# Altium PCB V3GPS_Rev3.PcbDoc
Units mm, origin at the board's own origin, x right, y up, seen from the top; angles counter-clockwise.
Board outline 43 x 47 mm, 4 copper layers (GND, Sig+Power1, Sig+Power2, GND2), stack 0.603 mm thick; 21 components, 16 nets, 85 pads, 116 vias.
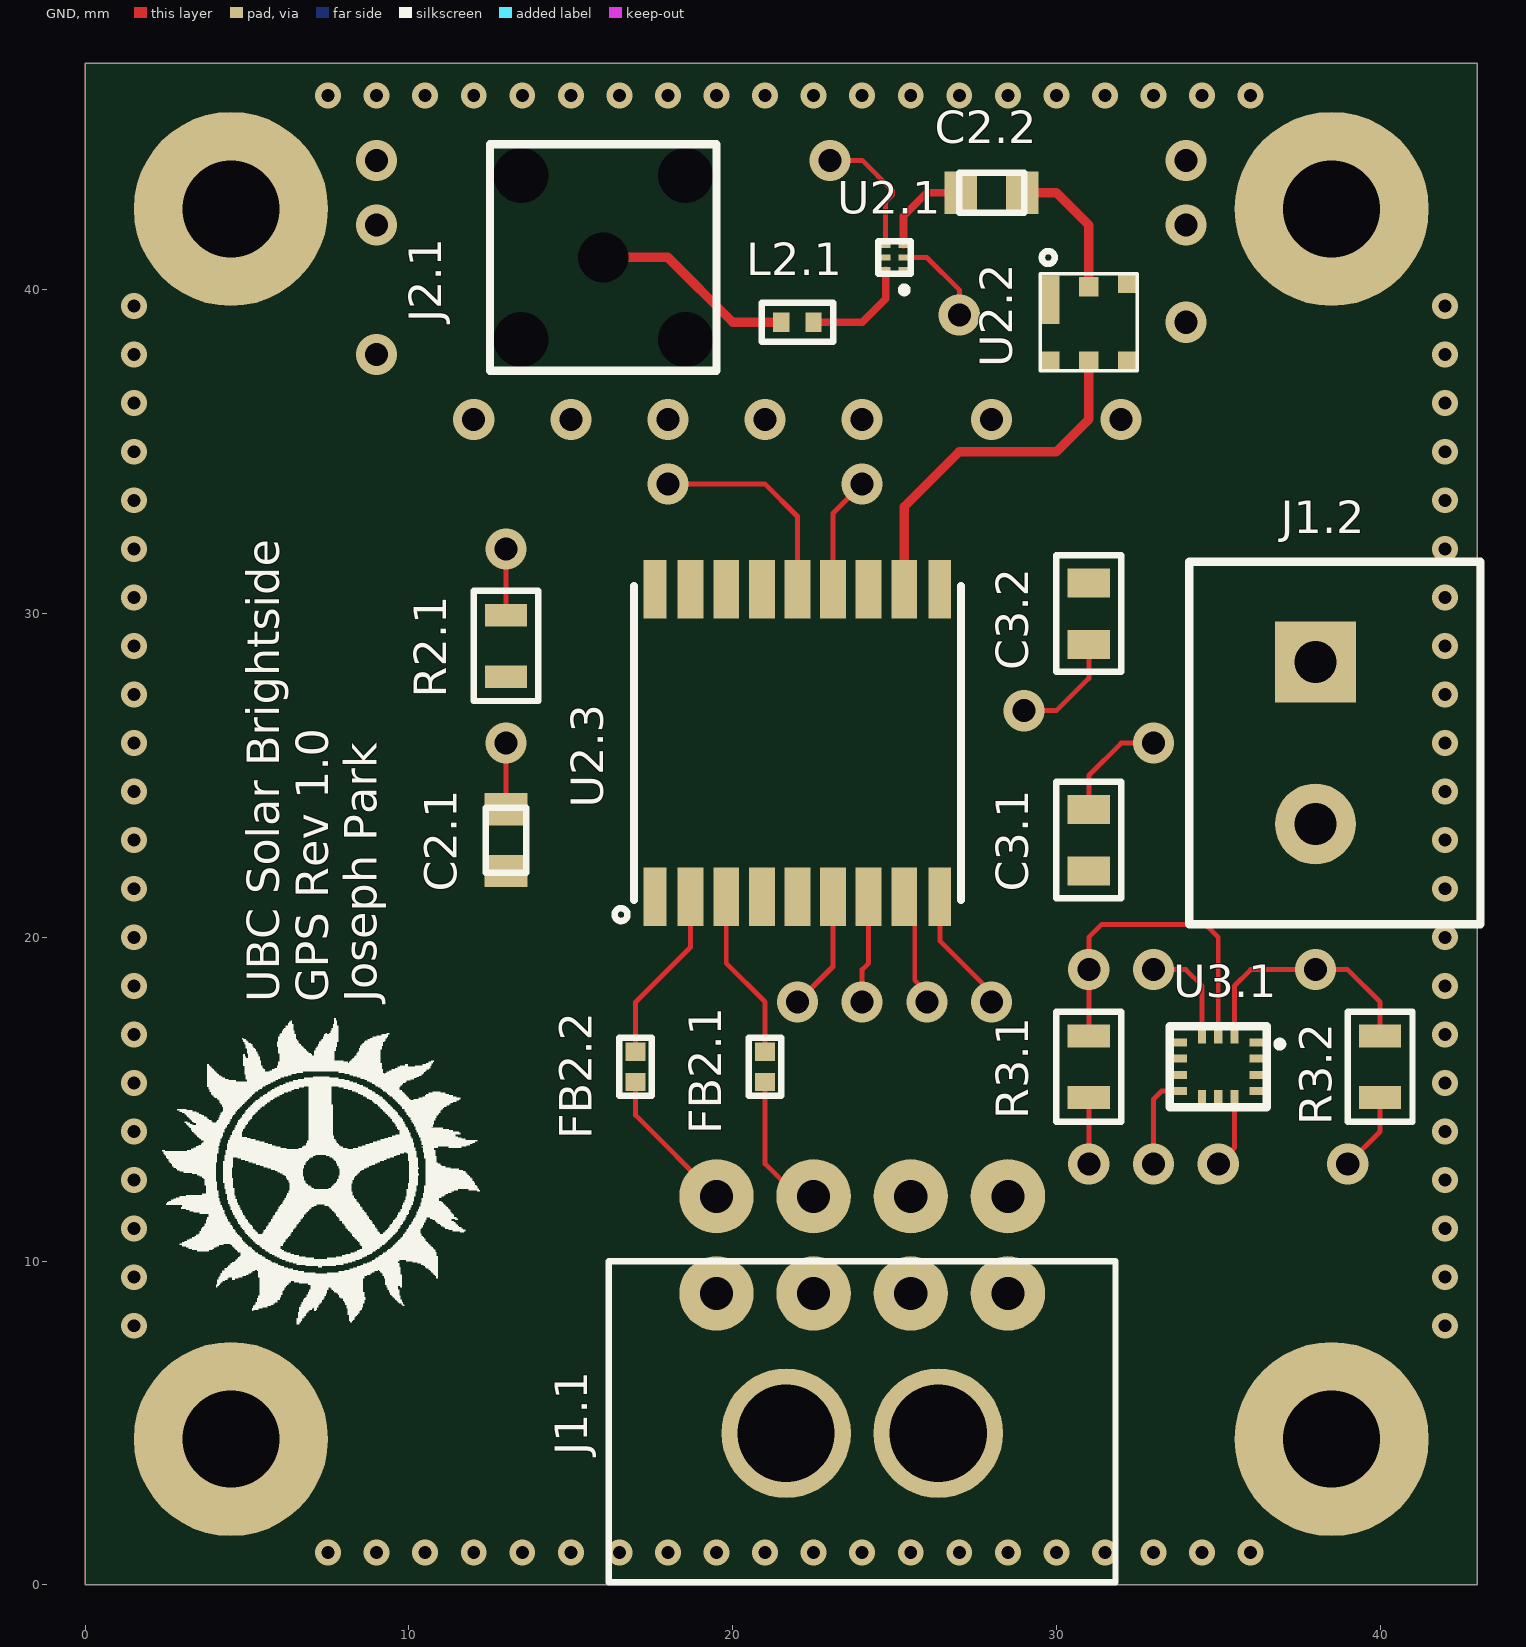
[diagram p0: GND view]
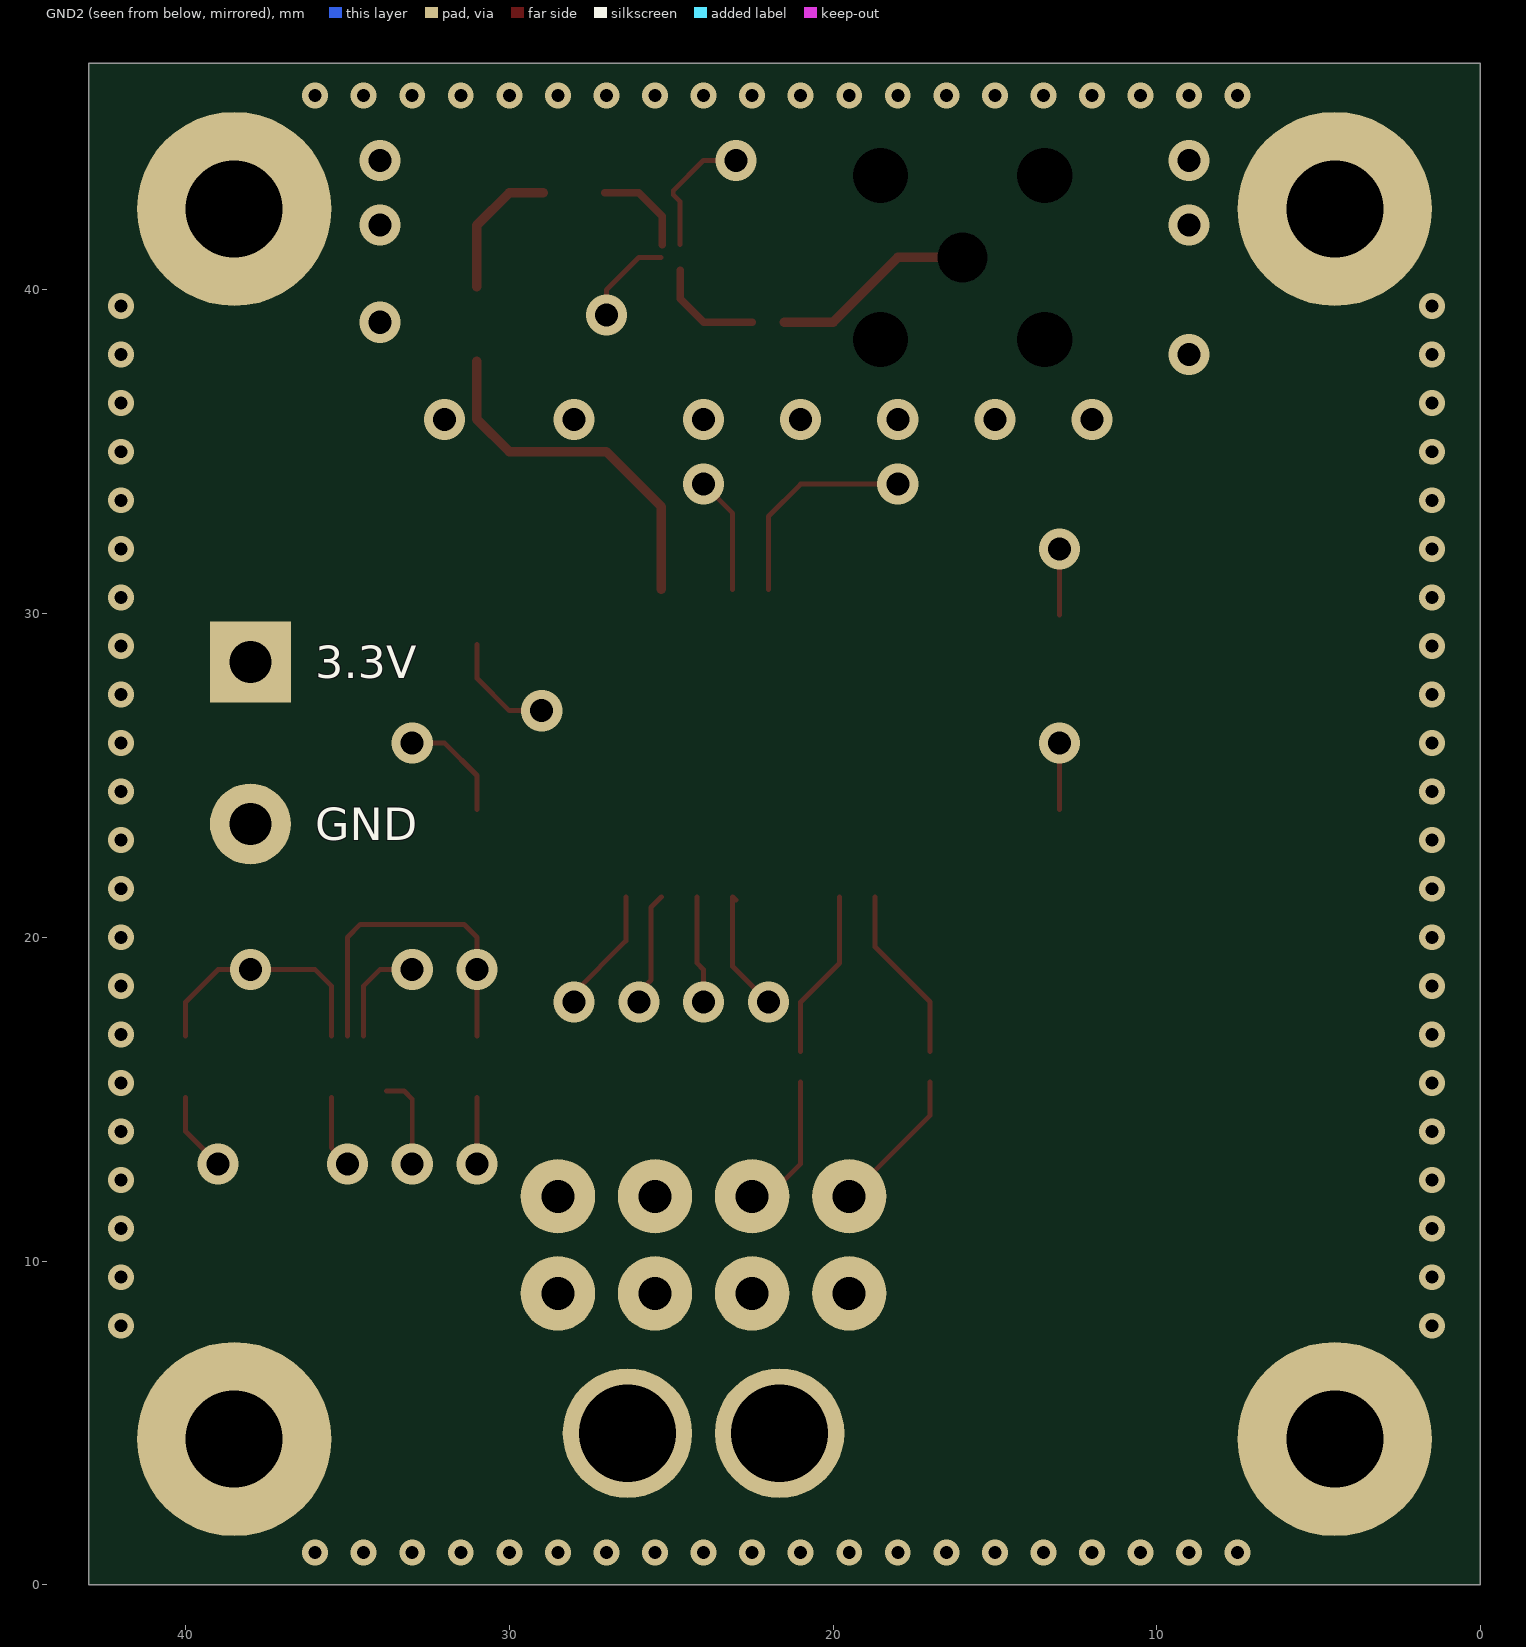
[diagram p1: GND2 view, seen from below]
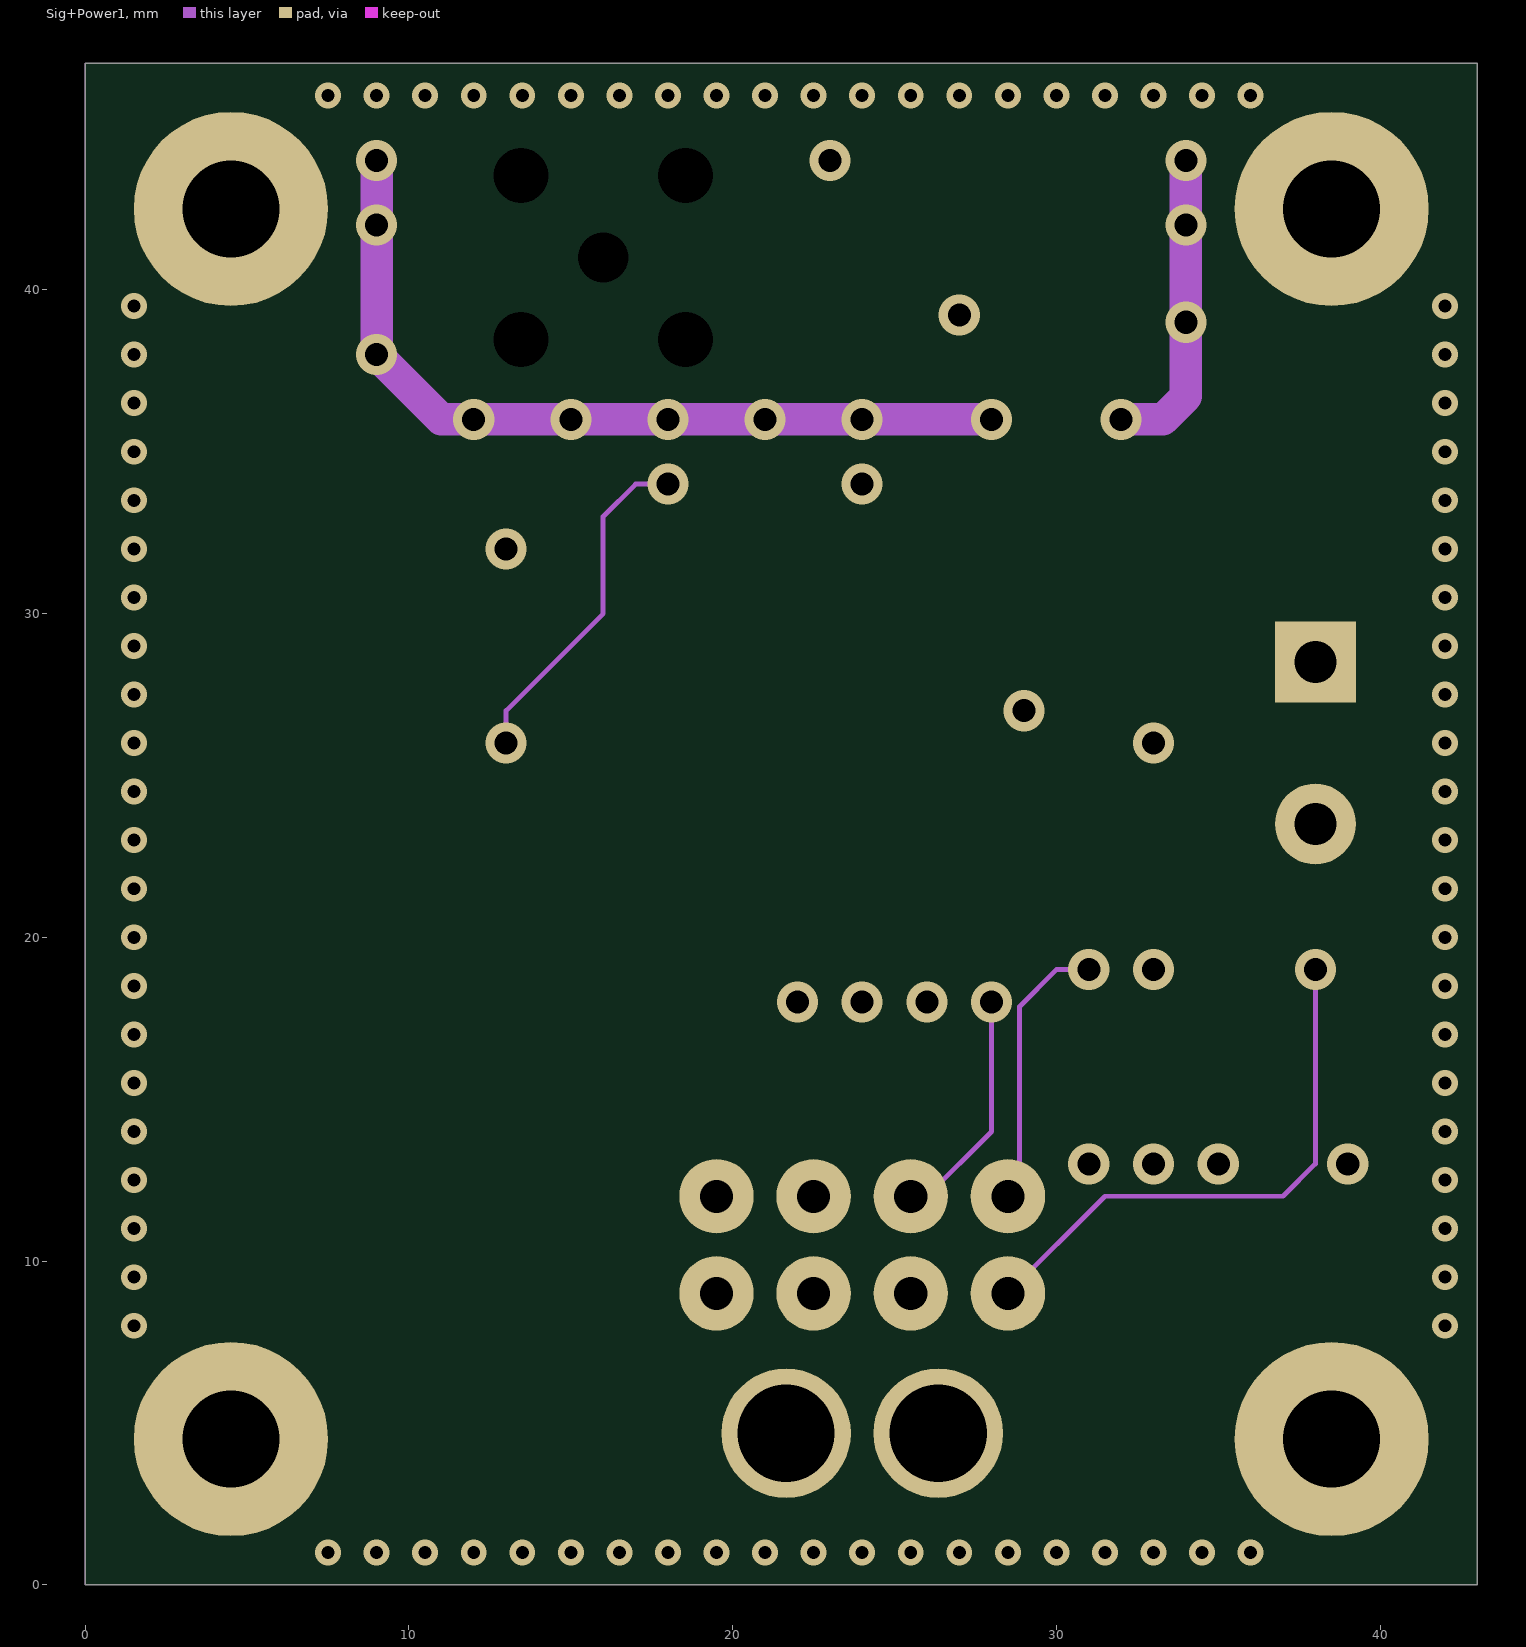
[diagram p2: Sig+Power1]
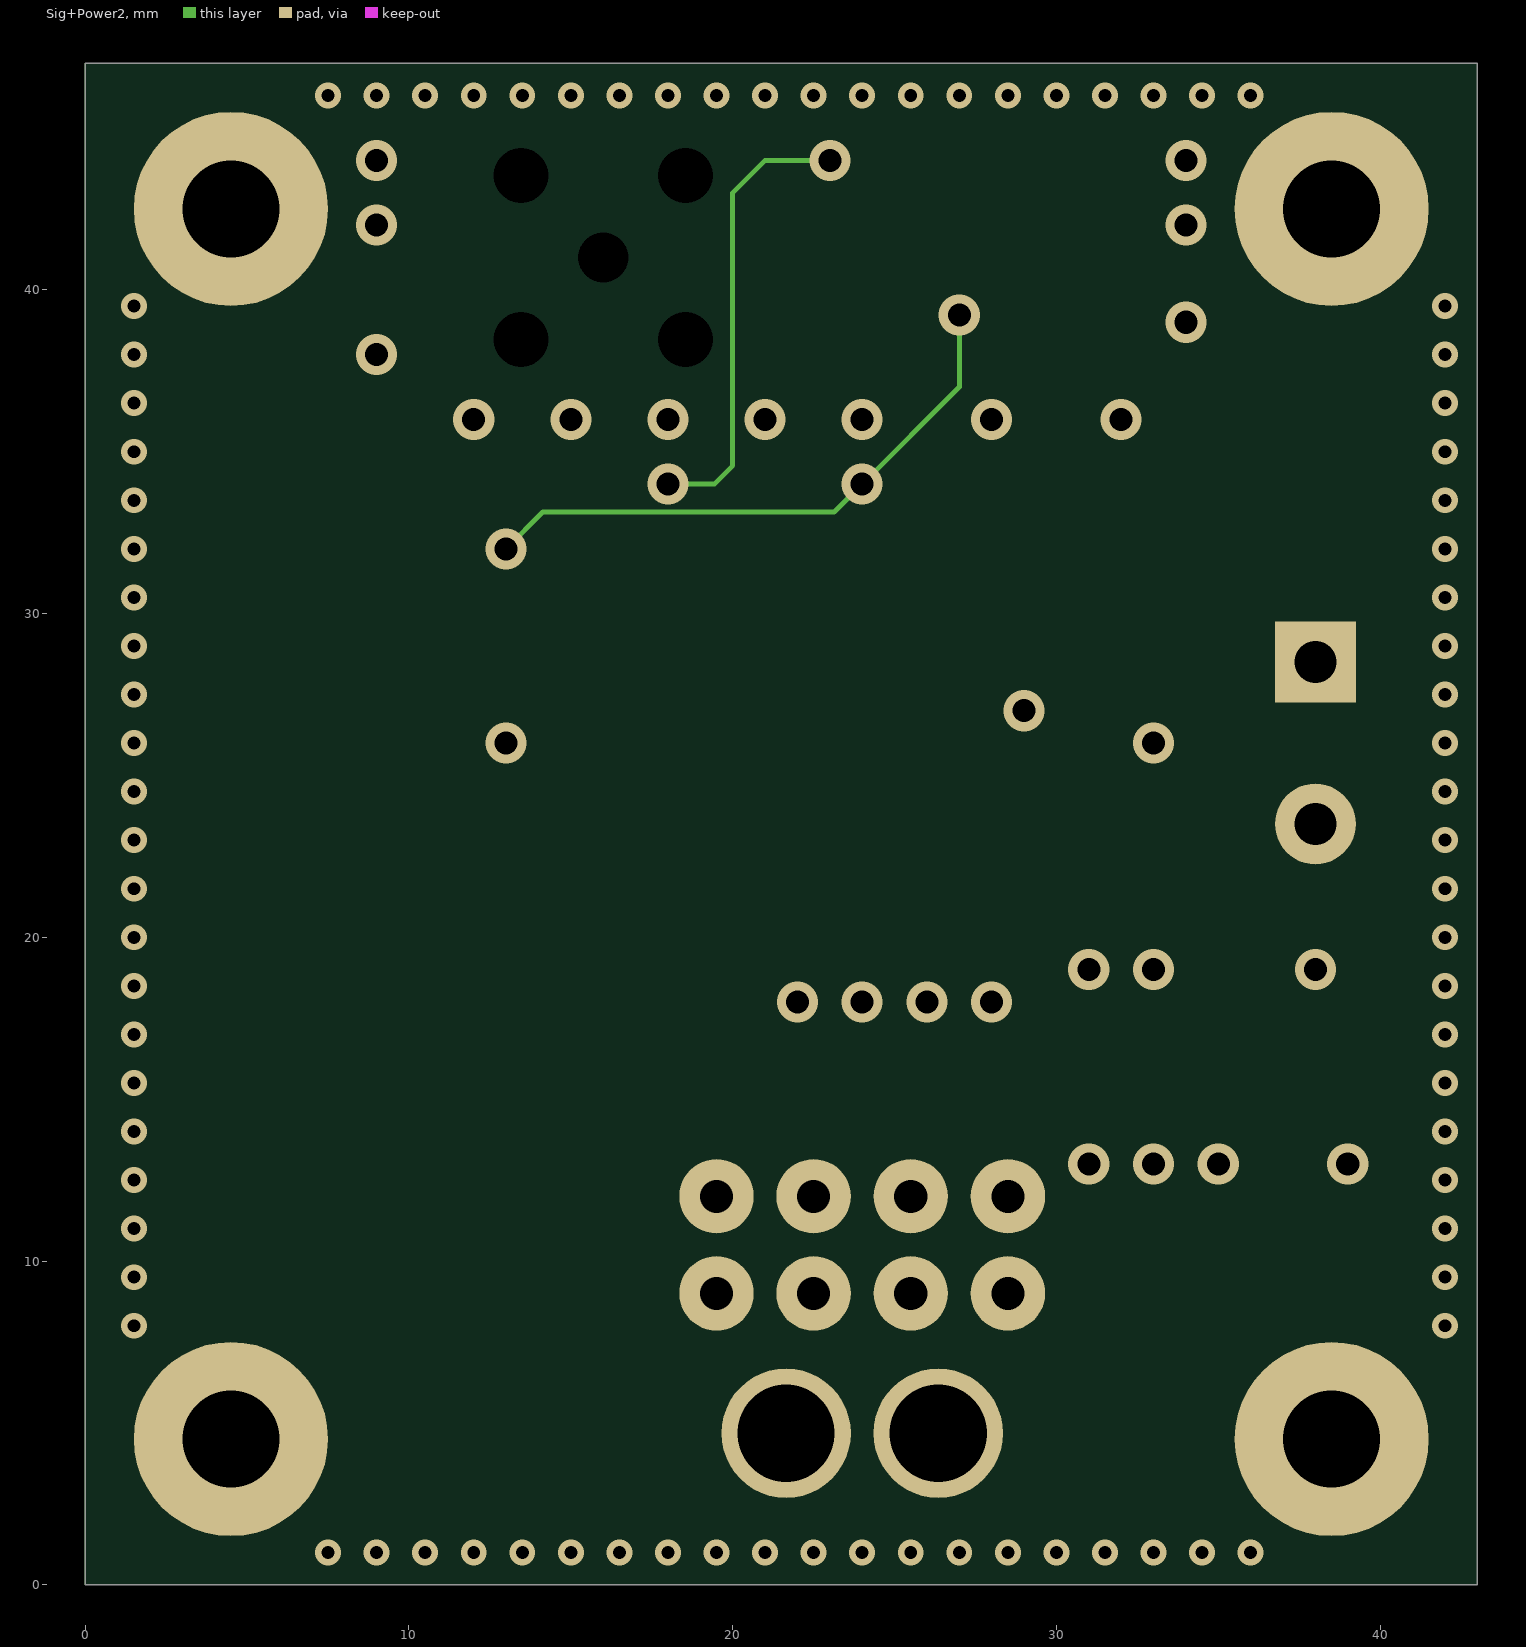
[diagram p3: Sig+Power2]

## Layer stack, top to bottom
Top Solder: solder mask 0.0102, Solder Resist, Dk 3.5
GND: signal copper 0.0356
Dielectric 2: prepreg 0.0711, PP-006, Dk 4.1
Sig+Power1: signal copper 0.035
Dielectric 1: dielectric 0.32, FR-4, Dk 4.8
Sig+Power2: signal copper 0.035
Dielectric 3: prepreg 0.0711, PP-006, Dk 4.1
GND2: signal copper 0.0356
Bottom Solder: solder mask 0.0102, Solder Resist, Dk 3.5

## Board outline
0,0 43,0 43,47 0,47

## Design rules (kind name [scope] priority, off if disabled: settings)
Clearance [All] p1: gap=0.152 ignorepadtopadclearanceinfootprint=FALSE
HoleSize [All] p1: absolutevalues=TRUE maxlimit=100 minlimit=0.4 maxpercent=80.000 minpercent=20.000
MinimumSolderMaskSliver [All] p1: minsoldermaskwidth=0
PolygonConnect [All] p1: connectstyle=Relief reliefconductorwidth=0.254 reliefentries=4 polygonreliefangle="90 Angle" airgapwidth=0.254
RoutingVias [All] p1: holewidth=0.4 width=0.8 viastyle="Through Hole" minholewidth=0.4 minwidth=0.6 maxholewidth=100 maxwidth=100
SilkToSolderMaskClearance [IsPad] p1: minsilkscreentomaskgap=0 clearancetoexposedcopper=TRUE
SolderMaskExpansion [All] p1: expansion=0.102
Width [All] p1: maxlimit=100 minlimit=0.152 preferedwidth=0.152
27 further rules are at their usual default settings.

## Classes and differential pairs
component class GPS: C2.1 C2.2 C3.1 C3.2 FB2.1 FB2.2 J1.1 J2.1 L2.1 R2.1 R3.1 R3.2 U2.1 U2.2 U2.3 U3.1

## Components (designator, comment, footprint, x,y, rotation, side; value= is the part's Value field where it differs from the comment)
C2.1 "1000pF" 0805 13,23 r90 top
C2.2 "2pF" 0805 28,43 r180 top
C3.1 "0.1uF" C0805 31,23 r90 top
C3.2 "0.1uF" C0805 31,30 r270 top
FB2.1 "BLM15HD102SN1D" L0402 21,16 r270 top
FB2.2 "BLM15HD102SN1D" L0402 17,16 r270 top
J1.1 "10132449-0821GLF" "Micro-Fit 3.0 8pos" 24,9 r0 top
J1.2 "Scru" "5mm 2POS Screw terminal" 38,26 r270 top
J2.1 "132136" 132136 16,41 r0 top
L2.1 "9.1nH" 0402 22,39 r180 top
R2.1 "10K" R0805 13,29 r90 top
R3.1 "10K" R0805 31,16 r270 top
R3.2 "10K" R0805 40,16 r270 top
U2.1 "NJG1143UA2-TE1" EPFFP6-A2 25,41 r90 top
U2.2 "B39162B3913U410" DCC6C 31,39 r0 top
U2.3 "MAX-8Q GPS Chip" "MAX-8Q GPS" 22,26 r270 top
U3.1 "LSM6DSO IMU" "LSM6DSO IMU" 35,16 r0 top
? "3mm Mounting Hole" "3mm Mounting Hole"#1 38,5 r0 top
? "3mm Mounting Hole" "3mm Mounting Hole"#2 4.5,4.5 r0 top
? "3mm Mounting Hole" "3mm Mounting Hole"#3 39,43 r0 top
? "3mm Mounting Hole" "3mm Mounting Hole"#4 3,43 r0 top

## Footprints (in the part's own frame and the unit in brackets; to place one, negate y for a bottom-side part, rotate by r counter-clockwise, add the part's x,y. Pads: shape width x height; smd on the part's side, far side on the other; paste and mask are expansions set on the pad)
"3mm Mounting Hole"#1 [mm]
  round 6 hole 3: 1(0.5,-0.5)
"3mm Mounting Hole"#2 [mm]
  round 6 hole 3: 1(0,0)
"3mm Mounting Hole"#3 [mm]
  round 6 hole 3: 1(-0.5,-0.5)
"3mm Mounting Hole"#4 [mm]
  round 6 hole 3: 1(1.5,-0.5)
"5mm 2POS Screw terminal" [mm]
  rect 2.5x2.5 hole 1.3: 1(-2.5,0)
  round 2.5 hole 1.3: 2(2.5,0)
  silkscreen extent -5.6,-3.9 5.6,5.1, body extent -5.04,-3.1 5.24,4.5, height 10.01
0402 [mm]
  rect 0.5x0.6 smd: 1(-0.5,0) 2(0.5,0)
  silkscreen extent -1.1,-0.6 1.1,0.6
0805 [mm]
  rect 1x1.32 smd: 1(-0.95,0) 2(0.95,0)
  silkscreen extent -1,-0.63 1,0.63
132136 [mm]
  round 1.55 hole 1.7: 1(-2.54,2.54) 2(-2.54,-2.54) 3(2.54,2.54) 4(2.54,-2.54)
  round 1.45 hole 1.55: 5(0,0)
  silkscreen extent -3.5,-3.5 3.5,3.5, body extent -3.52,-3.47 3.48,11.63, height 9.37
C0805 [mm]
  rect 0.9x1.3 smd: 1(-0.95,0) 2(0.95,0)
  silkscreen extent -1.8,-1 1.8,1, body extent -1.05,-0.67 1.05,0.67, height 0.94
DCC6C [mm] "footprint for B39162B3913U410CT-ND"
  rect 0.6x1.5 smd mask+0.102: 1(-1.2,0.7)
  rect 0.6x0.6 smd mask+0.102: 2(0,1.1) 3(1.2,1.2) 4(1.2,-1.2) 5(0,-1.2) 6(-1.2,-1.2)
  silkscreen extent -1.5,-1.5 1.5,2.2
EPFFP6-A2 [mm] "Footprint for NJG1143UA2"
  rect 0.2x0.3 smd mask+0.05: 1(-0.4,-0.275) 3(0.4,-0.275) 4(0.4,0.275) 6(-0.4,0.275)
  rect 0.2x0.375 smd mask+0.05: 2(0,-0.312) 5(0,0.313)
  silkscreen extent -1.1,-0.5 0.5,0.5
L0402 [mm] "Chip Inductor, 2-Leads, Body 1.00x0.50mm, IPC Medium Density"
  rect 0.57x0.62 smd: 1(-0.47,0) 2(0.47,0)
  silkscreen extent -0.9,-0.5 0.9,0.5, body extent -0.53,-0.28 0.53,0.27, height 0.5
"LSM6DSO IMU" [mm]
  rect 0.475x0.25 smd mask+0.05: 1(1.2,0.75) 2(1.2,0.25) 3(1.2,-0.25) 4(1.2,-0.75) 8(-1.2,-0.75) 9(-1.2,-0.25) 10(-1.2,0.25) 11(-1.2,0.75)
  rect 0.25x0.475 smd mask+0.05: 5(0.5,-0.95) 6(0,-0.95) 7(-0.5,-0.95) 12(-0.5,0.95) 13(0,0.95) 14(0.5,0.95)
  silkscreen extent -1.5,-1.25 2,1.25
"MAX-8Q GPS" [mm]
  rect 1.8x0.7 smd paste-10: 1(4.75,-4.4) 9(4.75,4.4) 10(-4.75,4.4) 18(-4.75,-4.4)
  rect 1.8x0.8 smd paste-10: 2(4.75,-3.3) 3(4.75,-2.2) 4(4.75,-1.1) 5(4.75,0) 6(4.75,1.1) 7(4.75,2.2) 8(4.75,3.3) 11(-4.75,3.3) 12(-4.75,2.2) 13(-4.75,1.1) 14(-4.75,0) 15(-4.75,-1.1) 16(-4.75,-2.2) 17(-4.75,-3.3)
  silkscreen extent -4.85,-5.65 5.5,5.05, body extent -4.85,-5.05 4.85,5.05, height 2.7
"Micro-Fit 3.0 8pos" [mm]
  round 2.3 hole 1.02: 1(4.5,0) 2(1.5,0) 3(-1.5,0) 4(-4.5,0) 5(4.5,3) 6(1.5,3) 7(-1.5,3) 8(-4.5,3)
  round 4 hole 3: ""(-2.35,-4.32) ""(2.35,-4.32)
  silkscreen extent -7.83,-8.92 7.83,1, body extent -8.07,-8.95 8.08,3.29, height 8.78
R0805 [mm]
  rect 0.7x1.3 smd: 1(-0.95,0) 2(0.95,0)
  silkscreen extent -1.7,-1 1.7,1, body extent -1.05,-0.67 1.05,0.68, height 0.6

## Part data
C2.1: library part 885012007040, "1000pF ±5% 25V Ceramic Capacitor C0G, NP0 0805 (2012 Metric)", ComponentLink1Description=Datasheet, ComponentLink1URL=https://katalog.we-online.de/pbs/datasheet/885012007040.pdf
C2.2: library part 08055A2R0CAT2A, "2pF ±0.25pF 50V Ceramic Capacitor C0G, NP0 0805 (2012 Metric)", ComponentLink1Description=Datasheet, ComponentLink1URL=http://datasheets.avx.com/C0GNP0-Dielectric.pdf
C3.1 C3.2: library part CL21B104KBCWPNC, "CAP CER 0.1UF 50V X7R 0805", Capacitance=100nF, Case/Package=0805, Case Code (Metric)=2012, Manufacturer=Samsung, Max Operating Temperature=125°C, Min Operating Temperature=-55°C, Ratings=AEC-Q200, Supplier Part Number 1=1276-6557-1-ND, Tolerance=10%, Voltage Rating=50V, Case Code (Imperial)=0805, Category=Capacitors, Features="Soft Termination", Length=0.079inch, Manufacturer Part Number=CL21B104KBCWPNC, Mount="Surface Mount", Packaging="Tape and Reel", Pricing 1="1 = 0.10000, 10 = 0.06700, 100 = 0.02990, 500 = 0.02138, 1000 = 0.01680 (USD)", RoHS=Yes, Stock 1=6545, Supplier 1=Digi-Key, Thickness=0.053inch, Width=0.049inch
FB2.1 FB2.2: "Ferrite Beads 0402 1Kohms Tape GHz Hi Spd Sig Line", Case/Package=Nonstandard, Current Rating=1.1A, DC Resistance (DCR)=286mR, Inductance=33uH, Inductance Tolerance=20%, Manufacturer="Taiyo Yuden", Manufacturer Part Number=NR6028T330M, Max Operating Temperature=120°C, Min Operating Temperature=-25°C, Package Quantity=2000, Self Resonant Frequency=10MHz, Supplier Part Number 1=587-2631-1-ND, Test Frequency=100kHz, Category="Fixed Inductors", ComponentLink1Description=datasheet, ComponentLink1URL=https://www.mouser.ca/datasheet/2/281/c31e-794748.pdf, ComponentLink2Description=mouser, ComponentLink2URL=https://www.mouser.ca/ProductDetail/Murata-Electronics/BLM15HD102SN1D?qs=0VEDk56ETTrhGT2kRvuD7A%3D%3D, Composition=Wirewound, Core Material=Ferrite, Depth=6.2mm, Halogen Free="Halogen Free", Height=2.8mm, Height - Seated (Max)=0.11inch, Length=0.236inch, Max DC Current=1.1A, Mount="Surface Mount", Number of Pins=2, Packaging="Tape and Reel", Radiation Hardening=No, REACH SVHC=Unknown, RMS Current (Irms)=1.1A, RoHS=Yes, Saturation Current=1.1A, Shielding=Shielded, Stock 1=53157, Supplier 1=Digi-Key, Termination=SMD/SMT, Tolerance=20%, Width=0.236inch
J1.1: "Micro-fit 3.0 8pos right-angle", Case/Package=SMC, Color=Black, Contact Resistance=10mR, Current Rating=5A, Flammability Rating="UL94 V-0", Insulation Resistance=1GR, Manufacturer=Molex, Manufacturer Part Number=43045-0800, Max Operating Temperature=105°C, Max Voltage Rating (DC)=250.25kV, Min Operating Temperature=-40°C, Package Quantity=1440, Supplier Part Number 1=WM1816-ND, Voltage Rating=600V, Voltage Rating (AC)=250V, Approvals=UL,CSA,TUV, Category="Headers and Wire Housings", ComponentLink1Description=https://datasheet.ciiva.com/5158/0430450800-pcb-headers-142625-5158817.pdf?src-supplier=Mouser, ComponentLink1URL=https://datasheet.ciiva.com/5158/0430450800-pcb-headers-142625-5158817.pdf?src-supplier=Mouser, ComponentLink2Description=https://datasheet.ciiva.com/7683/27645-7683683.pdf?src-supplier=Element14, ComponentLink2URL=https://datasheet.ciiva.com/7683/27645-7683683.pdf?src-supplier=Element14, ComponentLink3Description=https://datasheet.ciiva.com/11751/0900766b80027348-11751142.pdf?src-supplier=RSComponents, ComponentLink3URL=https://datasheet.ciiva.com/11751/0900766b80027348-11751142.pdf?src-supplier=RSComponents, ComponentLink4Description=https://datasheet.ciiva.com/30198/267770430450800-pcb-headers-30198875.pdf?src-supplier=Onlinecomponents.com, ComponentLink4URL=https://datasheet.ciiva.com/30198/267770430450800-pcb-headers-30198875.pdf?src-supplier=Onlinecomponents.com, ComponentLink5Description=https://datasheet.ciiva.com/19462/883536-19462164.pdf?src-supplier=Jameco, ComponentLink5URL=https://datasheet.ciiva.com/19462/883536-19462164.pdf?src-supplier=Jameco, ComponentLink6Description=https://datasheet.ciiva.com/14155/04402310-14155206.pdf?src-supplier=Distrelec, ComponentLink6URL=https://datasheet.ciiva.com/14155/04402310-14155206.pdf?src-supplier=Distrelec, ComponentLink7Description=https://datasheet.ciiva.com/16657/0430450800-pcb-headers-16657964.pdf?src-supplier=Avnet+Europe, ComponentLink7URL=https://datasheet.ciiva.com/16657/0430450800-pcb-headers-16657964.pdf?src-supplier=Avnet+Europe, ComponentLink8Description=https://datasheet.ciiva.com/10087/0430450800-pcb-headers-10087853.pdf?src-supplier=Avnet, ComponentLink8URL=https://datasheet.ciiva.com/10087/0430450800-pcb-headers-10087853.pdf?src-supplier=Avnet, ComponentLink9Description=https://datasheet.ciiva.com/1443/1850016-1443537.pdf?src-supplier=Element14, ComponentLink9URL=https://datasheet.ciiva.com/1443/1850016-1443537.pdf?src-supplier=Element14, Contact Material=Brass,Tin, Contact Plating=Tin, Depth=12.2mm, Diameter=3mm, Gender=Male, Glow Wire Compliant=Compliant, Halogen Free="Low Halogen", Height=8.77mm, Housing Color=Black, Housing Material=Thermoplastic, Lead Free="Lead Free", Length=16.15mm, Material=Polyester, Max Current Rating=5A, Mount="Through Hole", Number of Circuits=8, Number of Contacts=8, Number of Poles=8, Number of Positions=8, Number of Rows=2, Orientation="Right Angle", Packaging=Tray, Pitch=3mm, Radiation Hardening=No, REACH SVHC=Unknown, RoHS=Yes, Row Spacing=3mm, Stock 1=7880, Supplier 1=Digi-Key, Termination=Solder, Voltage Rating (DC)=250V, Working Voltage=250V
J1.2: library part "5mm 2POS Screw terminal"
J2.1: "Connector, rf coaxial,SMA right angle jack for p.c. board, 4 legs, .050 cont, 50 ohm", ComponentLink1Description=Digikey, ComponentLink1URL=https://www.digikey.ca/product-detail/en/amphenol-rf-division/132136/ACX1232-ND/1011909, ComponentLink2Description="Drawing datasheet", ComponentLink2URL=https://www.amphenolrf.com/media/downloads/211/132136.PDF
L2.1: library part LQP15MN9N1B02D, "Fixed Inductors 9.1nH 0402", ComponentLink1Description=datasheet, ComponentLink1URL=https://www.mouser.ca/datasheet/2/281/JELF243C-0015-1623907.pdf
R2.1 R3.1 R3.2: library part ERJ6ENF1002V, "RES SMD 10K OHM 1% 1/8W 0805", Case/Package=0805, Manufacturer=Yageo, Manufacturer Part Number=ERJ-6ENF1002V, Max Operating Temperature=155°C, Min Operating Temperature=-55°C, Power Rating=125mW, Resistance=10000R, Supplier Part Number 1=P10.0KCCT-ND, Temperature Coefficient=100ppm/°C, Tolerance=1%, Voltage Rating (DC)=150V, Category=Resistors, ComponentLink1Description=https://datasheet.ciiva.com/27056/2078477-27056611.pdf?src-supplier=Jameco, ComponentLink1URL=https://datasheet.ciiva.com/27056/2078477-27056611.pdf?src-supplier=Jameco, Depth=1.25mm, Height=0.5mm, Lead Free="Lead Free", Length=2mm, Mount="Surface Mount", Number of Pins=2, Packaging="Tape and Reel", Pricing 1="1 = 0.100000, 10 = 0.081000, 100 = 0.031100, 1000 = 0.013670, 2500 = 0.011810 (USD)", REACH SVHC="No SVHC", RoHS=No, Stock 1=3342401, Supplier 1=Digi-Key, Width=1.25mm
U2.1: "RF Amplifier Low Noise Amp GaAs MMIC 1.5V to 3.6V", ComponentLink1Description=mouser, ComponentLink1URL=https://www.mouser.ca/datasheet/2/294/NJG1143UA2_E-1539345.pdf
U2.2: "SAW Filter 1588MHzFrequency 50Ohm SMD 6Pin", ComponentLink1Description=datasheet, ComponentLink1URL=https://4donline.ihs.com/images/VipMasterIC/IC/TDKC/TDKC-S-A0001073526/TDKC-S-A0001072983-1.pdf?hkey=52A5661711E402568146F3353EA87419
U2.3: "High sensitivity of –166 dBm for single GNSS reception", ComponentLink1Description=datasheet, ComponentLink1URL=https://www.u-blox.com/en/product/max-8-series#tab-documentation-resources
U3.1: "3D digital accelerometer and a 3D digital gyroscope", ComponentLink1Description=datasheet, ComponentLink1URL=https://www.st.com/resource/en/datasheet/lsm6dso.pdf

## Via types
v1: diameter 0.8, hole 0.4, GND to GND2, 84 vias
v2: diameter 1.27, hole 0.711, GND to GND2, 32 vias

## Nets (pads, with @x,y where several pads share a name; then routed paths per layer and width w, separated by ;. In a path a pad name is that pad's centre, name@x,y a point inside that pad or via, vN(x,y) a via of type N, cw(c..) or ccw(c..) an arc to the next point about the centre after c; other vN are vias at no path point)
+3V3: C3.1.2 C3.2.2 J1.1.4 J1.2.1 R3.1.2 R3.2.2 U2.3.6 U2.3.7 U2.3.8 U3.1.5 U3.1.8 U3.1.12 | length 30.6
  GND w0.152: v2(22,18) 23.1,19.1 U2.3.6 U2.3.6@23,21.15 ; v2(24,18) 24,19 24.2,19.2 U2.3.7 ; U2.3.8 25.624,20.926 25.624,18.679 26,18.302 v2(26,18) ; v2(29,27) 30,27 31,28 C3.2.2 ; v2(31,13) R3.1.2 ; C3.1.2 31,25 32,26 v2(33,26) ; v2(33,13) 33,15 33.25,15.25 U3.1.8 ; v2(33,19) 34,19 34.5,18.5 U3.1.12 ; v2(35,13) 35.5,13.5 U3.1.5 ; v2(39,13) 40,14 R3.2.2
GND: C2.1.1 C3.1.1 C3.2.1 J1.1.3 J1.2.2 J2.1.1 J2.1.2 J2.1.3 J2.1.4 R2.1.1 U2.1.1 U2.1.5 U2.2.1 U2.2.3 U2.2.4 U2.2.6 U2.3.1 U2.3.10 U2.3.12 U3.1.6 U3.1.7 | length 35.4
  Sig+Power1 w1: v2(9,44) v2(9,42) v2(9,38) 11,36 v2(12,36) v2(15,36) v2(18,36) v2(21,36) v2(24,36) v2(28,36) ; v2(32,36) 33.287,36 34,36.713 v2(34,39) v2(34,42) v2(34,44)
  other v1: 7.5,1 9,1 10.5,1 12,1 13.5,1 15,1 16.5,1 18,1 19.5,1 21,1 22.5,1 24,1 25.5,1 27,1 28.5,1 30,1 31.5,1 33,1 34.5,1 36,1 1.5,8 42,8 1.5,9.5 42,9.5 1.5,11 42,11 1.5,12.5 42,12.5 1.5,14 42,14 1.5,15.5 42,15.5 1.5,17 42,17 1.5,18.5 42,18.5 1.5,20 42,20 1.5,21.5 42,21.5 1.5,23 42,23 1.5,24.5 42,24.5 1.5,26 42,26 1.5,27.5 42,27.5 1.5,29 42,29 1.5,30.5 42,30.5 1.5,32 42,32 1.5,33.5 42,33.5 1.5,35 42,35 1.5,36.5 42,36.5 1.5,38 42,38 1.5,39.5 42,39.5 7.5,46 9,46 10.5,46 12,46 13.5,46 15,46 16.5,46 18,46 19.5,46 21,46 22.5,46 24,46 25.5,46 27,46 28.5,46 30,46 31.5,46 33,46 34.5,46 36,46
LNA_EN: R2.1.2 U2.1.2 U2.3.13 | length 26.8
  GND w0.152: R2.1.2 v2(13,32) ; U2.3.13 23.1,33.1 v2(24,34) ; U2.1.2 26,41 27,40 v2(27,39.224)
  Sig+Power2 w0.152: v2(13,32) 14.136,33.136 23.136,33.136 v2(24,34) 27,37 v2(27,39.224)
NetC2.2_1: C2.2.1 U2.2.2 | length 4.4
  GND w0.293: C2.2.1 30,43 31,42 U2.2.2
NetC2.2_2: C2.2.2 U2.1.3 | length 3
  GND w0.235: U2.1.3 25.275,42.275 26,43 C2.2.2
NetFB2.1_1: FB2.1.1 U2.3.3 | length 5.3
  GND w0.152: U2.3.3 19.8,19.2 21,18 FB2.1.1
NetFB2.2_1: FB2.2.1 U2.3.2 | length 5.5
  GND w0.152: FB2.2.1 17,18 18.7,19.7 U2.3.2
NetJ2.1_5: J2.1.5 L2.1.2 | length 6.3
  GND w0.293: J2.1.5 18,41 20,39 L2.1.2
NetL2.1_1: L2.1.1 U2.1.6 | length 3.4
  GND w0.235: L2.1.1 24,39 24.725,39.725 U2.1.6
NetU2.2_5: U2.2.5 U2.3.11 | length 11.2
  GND w0.293: U2.3.11 25.3,33.3 27,35 30,35 31,36 U2.2.5
PA2: FB2.1.2 J1.1.7 | length 4.4
  GND w0.152: FB2.1.2 21,13 22,12 J1.1.7
PA3: FB2.2.2 J1.1.8 | length 4.6
  GND w0.152: FB2.2.2 17,14.5 J1.1.8
PA5: J1.1.6 U2.3.9 | length 10.7
  GND w0.152: U2.3.9 26.4,19.892 28,18.292 v2(28,18)
  Sig+Power1 w0.152: J1.1.6@26,12 28,14 v2(28,18)
PB6: J1.1.5 R3.1.1 U3.1.13 | length 19.1
  GND w0.152: R3.1.1 v2(31,19) 31,20 31.4,20.4 34.6,20.4 35,20 U3.1.13
  Sig+Power1 w0.152: J1.1.5 28.864,12.364 28.864,17.864 30,19 v2(31,19)
PB7: J1.1.1 R3.2.1 U3.1.14 | length 24.9
  GND w0.152: U3.1.14 35.5,18.5 36,19 v2(38,19) 39,19 40,18 R3.2.1
  Sig+Power1 w0.152: J1.1.1 31.5,12 37,12 38,13 v2(38,19)
VDD: C2.1.2 U2.1.4 U2.3.14 | length 37.5
  GND w0.152: C2.1.2 v2(13,26) ; v2(18,34) 20.864,34 21,34 22,33 U2.3.14 ; v2(23,44) 24,44 24.937,43.063 24.937,42.937 24.725,42.725 U2.1.4
  Sig+Power1 w0.152: v2(13,26) 13,27 16,30 16,33 17,34 v2(18,34)
  Sig+Power2 w0.152: v2(18,34) 19.432,34 20,34.568 20,43 21,44 v2(23,44)
pads on no net: ?.1 J1.1. J1.1.2 U2.3.4 U2.3.5 U2.3.15 U2.3.16 U2.3.17 U2.3.18 U3.1.1 U3.1.2 U3.1.3 U3.1.4 U3.1.9 U3.1.10 U3.1.11

## Polygon pours and split planes (outlines as drawn)
GND on GND2 "GND2" (solid, shelved, pour order 8): 0,47 0,0 43,0 43,47
+3V3 on Sig+Power1 "PWR1" (solid, shelved, pour order 12): 0,47 43,47 43,0 0,0
+3V3 on Sig+Power2 "PWR2" (solid, shelved, pour order 14): 0,47 43,47 43,0 0,0
GND on GND "GND" (solid, shelved, pour order 10): 0,47 43,47 43,0 0,0

## Other copper
Sig+Power1:
  pour cut-out: 0,3 43,3 43,0 0,0
  pour cut-out: 0,47 3,47 3,0 0,0
  pour cut-out: 40,47 40,0 43,0 43,47
  pour cut-out: 41,47
  pour cut-out: 0,47 43,47 43,45 0,45
  pour cut-out: 8,47 35,47 35,33 8,33
Sig+Power2:
  pour cut-out: 0,3 0,0 43,0 43,3
  pour cut-out: 0,47 3,47 3,0 0,0
  pour cut-out: 40,47 40,0 43,0 43,47
  pour cut-out: 0,47 43,47 43,45 0,45
  pour cut-out: 8,47 35,47 35,33 8,33

## Silkscreen, mask and mechanical layers (free items; w line width, h text height)
Top Overlay:
  drawing of 2 lines, arcs and shapes, not listed
  text "UBC Solar Brightside / GPS Rev 1.0 / Joseph Park" at 9,18 h1 r90
Bottom Overlay:
  text "3.3V" at 36,28 h1
  text "GND" at 36,23 h1